# Altium PCB PCB_EMG_IMU.PcbDoc
Units mil, origin at the board's own origin, x right, y up, seen from the top; angles counter-clockwise.
Board outline 1570 x 985 mil, 4 copper layers (L1, L2, L3, L4), stack 30.634 mil thick; 65 components, 74 nets, 272 pads, 144 vias.
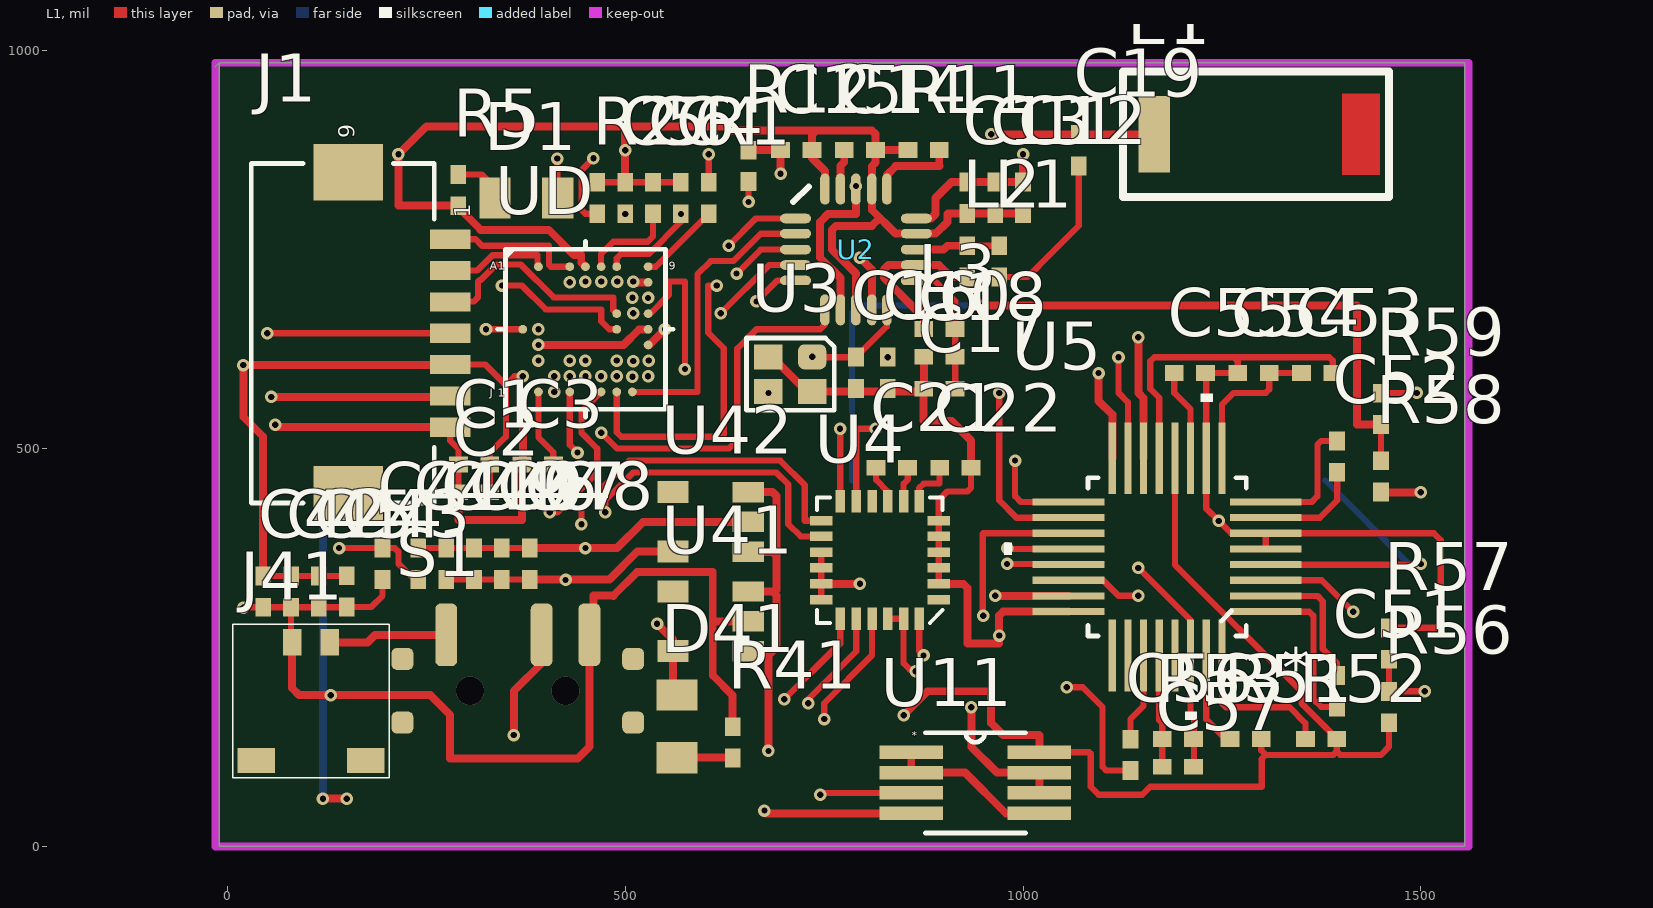
[diagram p0: L1 view]
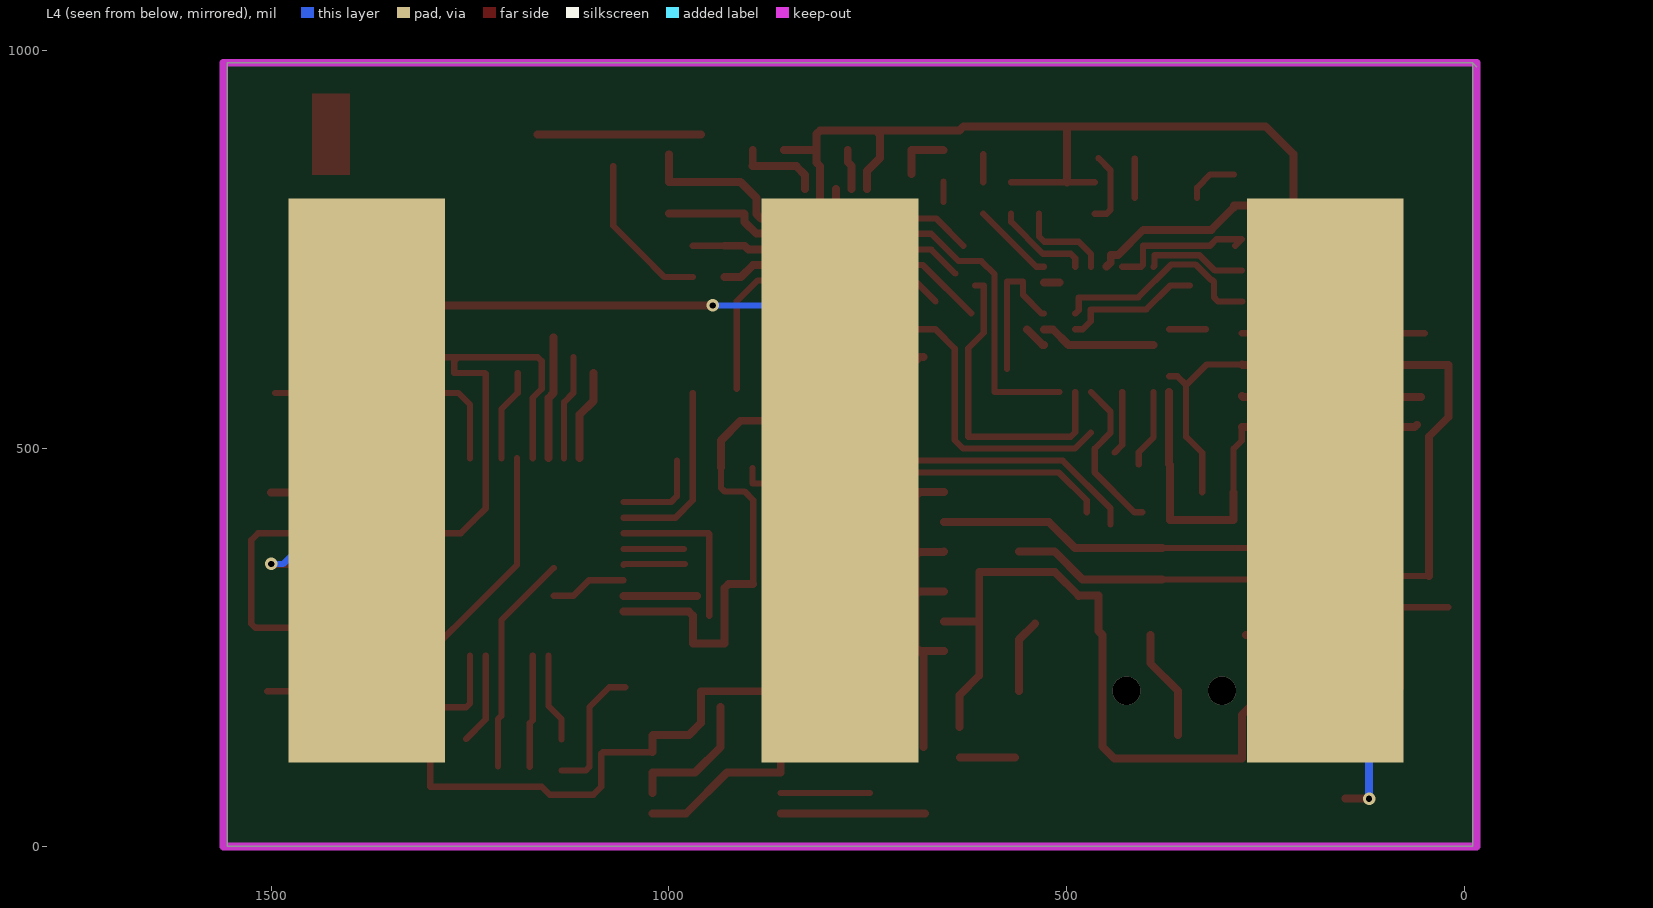
[diagram p1: L4 view, seen from below]
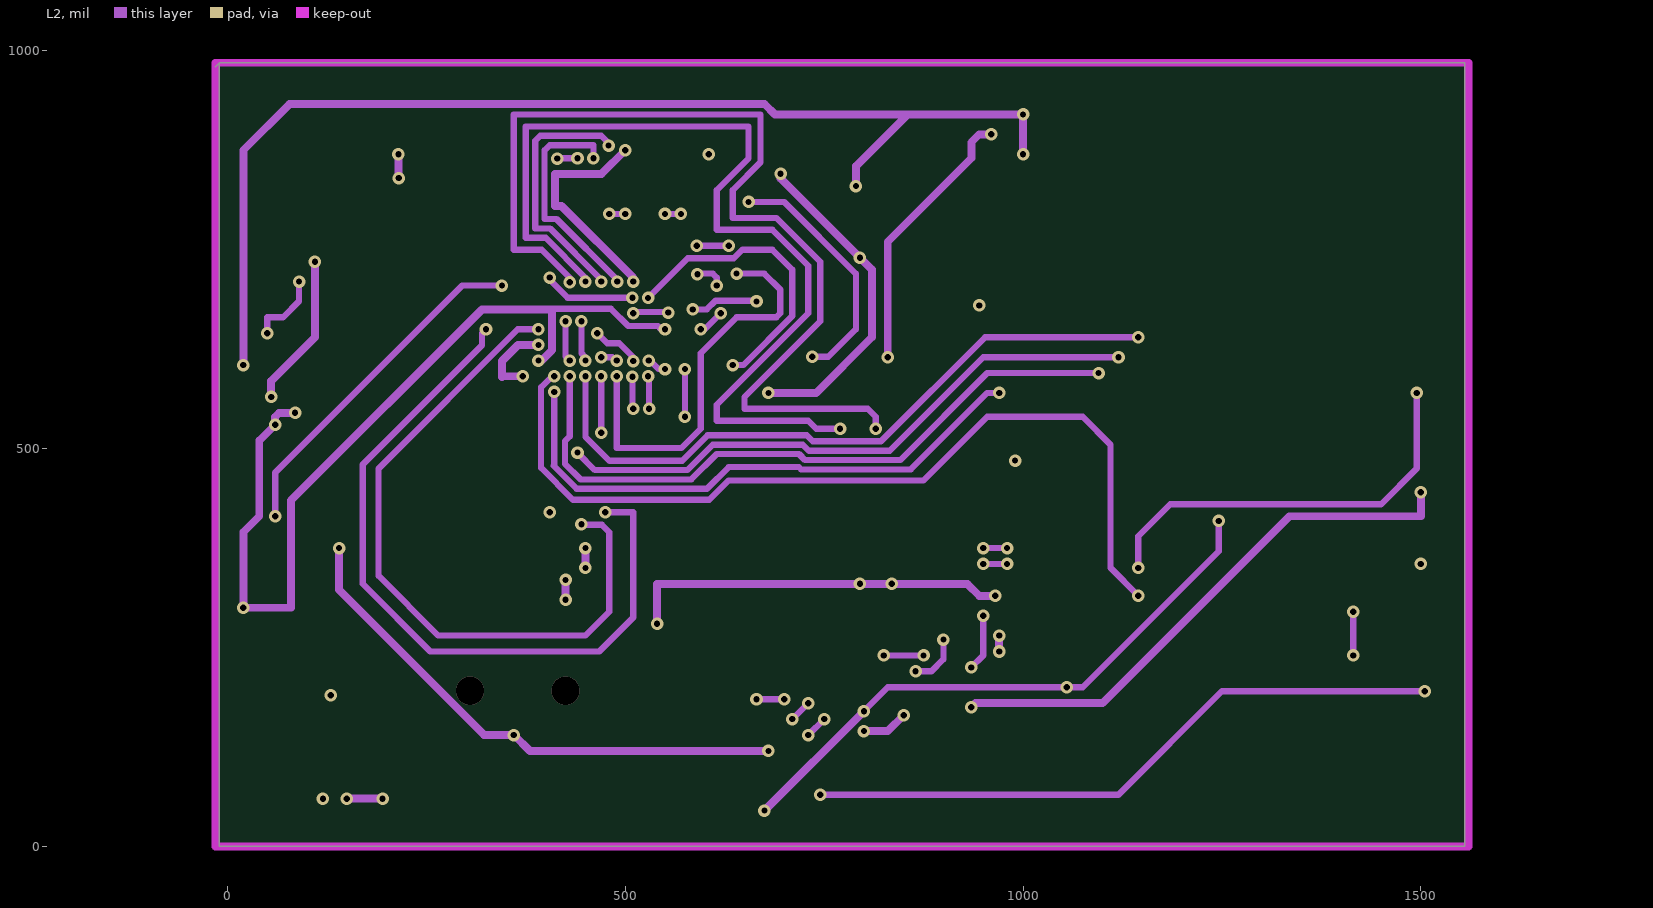
[diagram p2: L2]
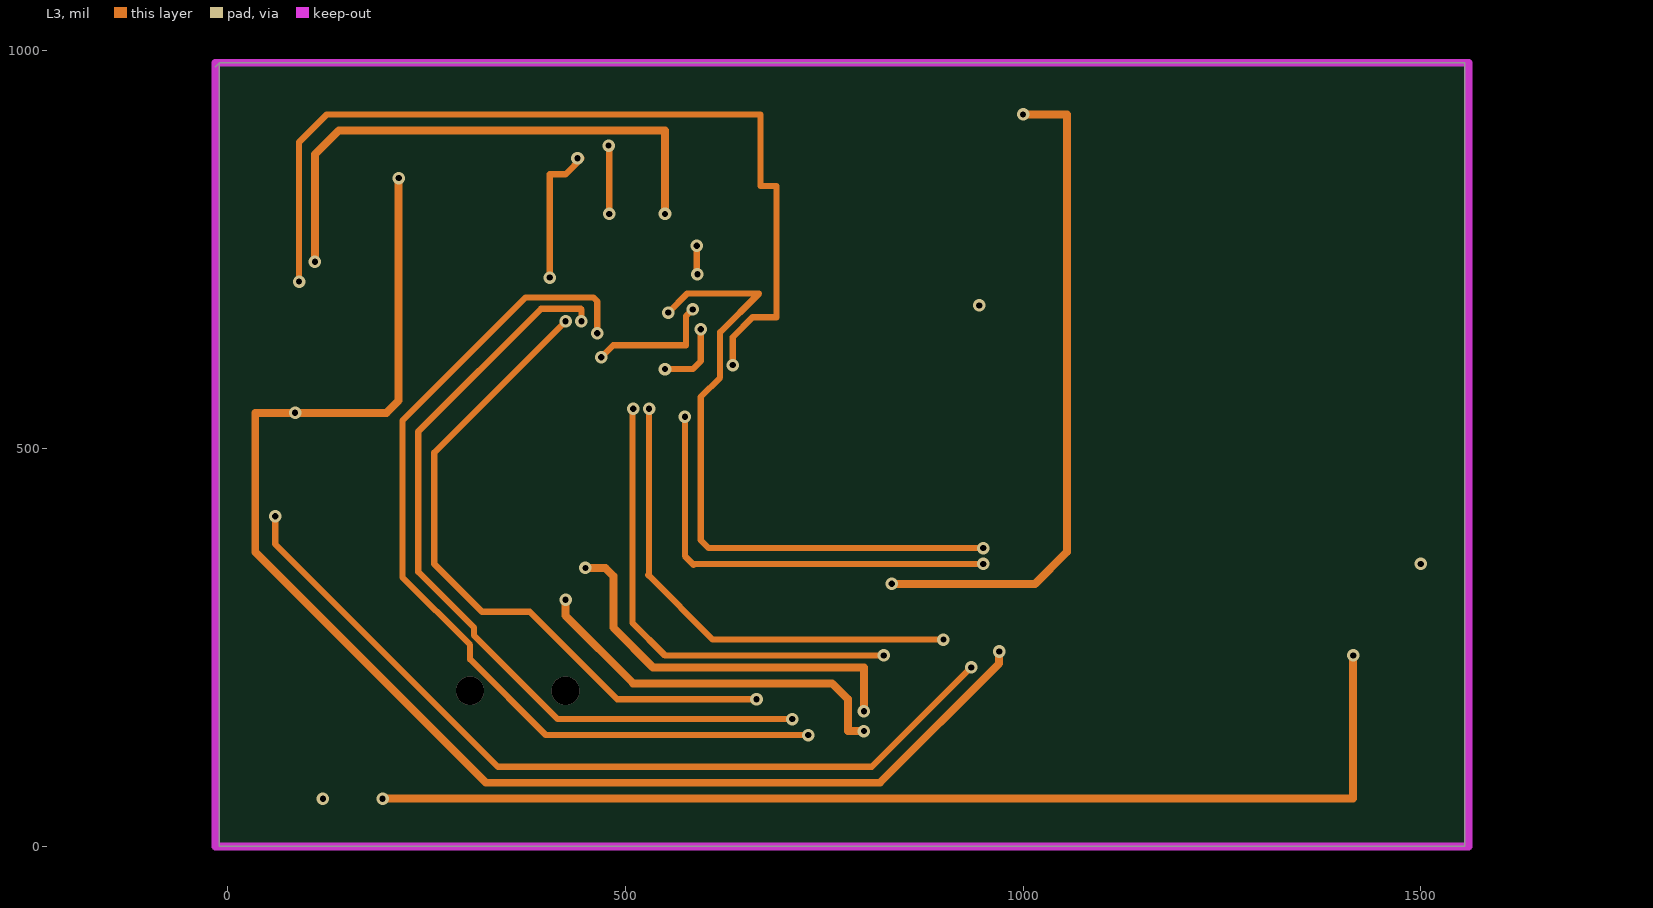
[diagram p3: L3]

## Layer stack, top to bottom
Top Solder: solder mask 0.4, Solder Resist, Dk 3.5
L1: signal copper 1.4
Dielectric 1: core 10, Dk 4.2
L2: signal copper 1.417
Dielectric 4: prepreg 5, Dk 4.2
L3: signal copper 1.417
Dielectric 5: core 10, FR-4, Dk 4.2
L4: signal copper 1.4
Bottom Solder: solder mask 0.4, Solder Resist, Dk 3.5

## Board outline
-15,980 -10,985 1555,985 1555,0 -10,0 -10,985

## Design rules (kind name [scope] priority, off if disabled: settings)
Clearance [All] p1: gap=3.94
PlaneConnect [All] p1: planeconnectstyle=Relief reliefexpansion=10 reliefentries=4 reliefconductorwidth=6 reliefairgap=5
PolygonConnect [All] p1: connectstyle=Relief reliefconductorwidth=10 reliefentries=4 polygonreliefangle="90 Angle" airgapwidth=10
RoutingVias [All] p1: holewidth=7.87 width=15.75 viastyle="Through Hole" minholewidth=7.87 minwidth=15.75 maxholewidth=28 maxwidth=50
SolderMaskExpansion [All] p1: expansion=4
Width [All] p1: maxlimit=10 minlimit=3.94 preferedwidth=3.94
29 further rules are at their usual default settings.

## Classes and differential pairs
component class PMU: C41 C42 C43 C44 C45 C46 C47 C48 C49 C410 D41 J41 R41 S1 U41 U42
component class nRF24L01: C10 C11 C12 C13 C14 C15 C16 C17 C18 C19 E1 L1 L2 L3 R11 R12 U2 U3
component class MSP430F5528ZQFE: C1 C2 C3 C4 C5 C6 D1 J1 R1 R2 R5 UD
component class LSM9DS0: C21 C22 U4
component class AFE_ADS129X: C51 C52 C53 C54 C55 C56 C57 R51 R52 R53 R56 R57 R58 R59 U5 U11

## Components (designator, comment, footprint, x,y, rotation, side; value= is the part's Value field where it differs from the comment)
C1 "Cap Semi" 0402 310,480 r180 top
C2 "Cap Semi" 0402 310,445 r180 top
C3 "Cap Semi" 0402 390,480 r180 top
C4 "Cap Semi" 0402 570,815 r90 top
C5 "Cap Semi" 0402 500,815 r270 top
C6 "Cap Semi" 0402 535,815 r270 top
C10 "" 0402 830,595.31 r270 top
C11 "" 0402 965,815.31 r90 top
C12 "" 0402 1000,815.31 r90 top
C13 "" 0402 930,815.31 r90 top
C14 "" 0402 795,875.31 r180 top
C15 "" 0402 715,875.31 r180 top
C16 "" 0402 790,595.31 r90 top
C17 "" 0402 895,575.31 r0 top
C18 "" 0402 895,615.31 r0 top
C19 "" 0402 1070,875 r270 top
C21 "Cap Semi" 0402 835,476.09 r0 top
C22 "Cap Semi" 0402 915,476.09 r180 top
C41 "Cap Semi" 0402 195,355.32 r90 top
C42 "Cap Semi" 0402 45,320.32 r90 top
C43 "Cap Semi" 0402 150,320.63 r90 top
C44 "Cap Semi" 0402 115,320.32 r90 top
C45 "Cap Semi" 0402 80,320.32 r90 top
C46 "Cap Semi" 0402 310,355.32 r270 top
C47 "Cap Semi" 0402 345,355.32 r270 top
C48 "Cap Semi" 0402 380,355.32 r270 top
C49 "Cap Semi" 0402 275,355.32 r270 top
C51 "Cap Semi" 0402 1394.69,195 r90 top
C52 "Cap Semi" 0402 1394.69,490 r90 top
C53 "Cap Semi" 0402 1369.69,595 r0 top
C54 "Cap Semi" 0402 1289.69,595 r180 top
C55 "Cap Semi" 0402 1209.69,595 r0 top
C56 "Cap Semi" 0402 1135,115 r270 top
C57 "Cap Semi" 0402 1194.69,100 r0 top
C410 "Cap Semi" 0402 240,355.32 r270 top
D1 "Led2 verte" "0805 (2012 metric)" 415,815 r90 top
D41 "Alim led verte" "0805 (2012 metric)" 565,190.32 r180 top
E1 "" ANT-2.45-CHP-B 1165,895 r0 top
J1 "FH12-7S-1SH(55)" CON7_1X7_DRBF_HS 170,650 r90 top
J41 "WM4459CT-ND" WM4459CT-ND 105,175.63 r180 top
L1 "" 0402 970,735.31 r270 top
L2 "" 0402 930,735.31 r90 top
L3 "" 0402 895,650.31 r0 top
R1 "" 0402 605,815 r270 top
R2 "" 0402 465,815 r90 top
R5 "" 0402 290,825 r270 top
R11 "" 0402 875,875.31 r0 top
R12 "" 0402 655,855.31 r90 top
R41 "" 0402 635,130.63 r90 top
R51 "" 0402 1279.69,135 r180 top
R52 "" 0402 1374.69,135 r180 top
R53 "" 0402 1194.69,135 r0 top
R56 "" 0402 1460,175 r270 top
R57 "" 0402 1460,255 r270 top
R58 "" 0402 1450,465 r90 top
R59 "" 0402 1450,550 r90 top
S1 "SWITCH" CUS-12B 365,85.63 r0 top
U2 "nRF24L01p" Component_nRF 790,750.31 r270 top
U3 "16MHz XTAL" 8Y-16.000MAAV-T 735,615.31 r180 top
U4 "Component_1" PCBComponent_1 820.22,360 r90 top
U5 "ADS1291_PBS_32" ADS129X 1181.1,364 r180 top
U11 "ADA4505-2ARMZ-RL" ADA4505-2ARM 940,80 r0 top
U41 "Reg 3.3V" TSOP-5ll 560,320.32 r270 top
U42 "Reg 3.3V" TSOP-5ll 560,445.32 r270 top
UD "Component_1" MSP430F5528ZQFE 450,650 r0 top

## Footprints (in the part's own frame and the unit in brackets; to place one, negate y for a bottom-side part, rotate by r counter-clockwise, add the part's x,y. Pads: shape width x height; smd on the part's side, far side on the other; paste and mask are expansions set on the pad)
8Y-16.000MAAV-T [mm] "SMD Crystal"
  rrect50% 0.9x0.8 smd: 1(0,0)
  rect 0.9x0.8 smd: 2(1.4,0) 3(1.4,1.1) 4(0,1.1)
  silkscreen extent -0.7,-0.6 2.1,1.7
0402 [mm] "Chip Capacitor, Body 1.0x0.5mm, IPC High Density"
  rect 0.6x0.5 smd: 1(-0.5,0) 2(0.5,0)
  body extent -0.55,-0.3 0.55,0.3, height 1.3
"0805 (2012 metric)" [mm] "Standard"
  rect 1.3x1 smd: 1(0,0) 2(0,2)
  body extent -0.7,-0.53 0.7,2.47, height 1.1
ADA4505-2ARM [mil]
  rect 80x17 smd mask+4: 1(-80.5,38.39) 2(-80.5,12.8) 3(-80.5,-12.8) 4(-80.5,-38.39) 5(80.5,-38.39) 6(80.5,-12.8) 7(80.5,12.8) 8(80.5,38.39)
  silkscreen extent -63,-63 63,63, body extent -80,-60 80,65, height 6
ADS129X [mil]
  rect 90x9 smd: 1(-124,68.9) 2(-124,49.21) 3(-124,29.53) 4(-124,9.84) 5(-124,-9.84) 6(-124,-29.53) 7(-124,-49.21) 8(-124,-68.9) 17(124,-68.9) 18(124,-49.21) 19(124,-29.53) 20(124,-9.84) 21(124,9.84) 22(124,29.53) 23(124,49.21) 24(124,68.9)
  rect 9x90 smd: 9(-68.9,-124) 10(-49.21,-124) 11(-29.53,-124) 12(-9.84,-124) 13(9.84,-124) 14(29.53,-124) 15(49.21,-124) 16(68.9,-124) 25(68.9,124) 26(49.21,124) 27(29.53,124) 28(9.84,124) 29(-9.84,124) 30(-29.53,124) 31(-49.21,124) 32(-68.9,124)
  silkscreen extent -100,-205 205,205
ANT-2.45-CHP-B [mil] "2.4 GHz Chip Anetnna"
  rect 40x96.46 smd: 1(0,0)
  L1 region: 236.22,-51.18 283.46,-51.18 283.46,51.18 236.22,51.18
  silkscreen extent -39,-79 295,79
Component_nRF [mil]
  rrect100% 12x39 smd: 1(-38.9,-75.9) 2(-19.9,-75.9) 3(0.1,-75.9) 4(19.51,-75.9) 5(38.93,-75.9) 11(38.93,75.9) 12(19.51,75.9) 13(0.1,75.9) 14(-19.9,75.9) 15(-38.9,75.9)
  rrect100% 39x12 smd: 6(75.9,-38.93) 7(75.9,-19.51) 8(75.9,-0.1) 9(75.9,19.9) 10(75.9,38.9) 16(-75.9,38.9) 17(-75.9,19.9) 18(-75.9,-0.1) 19(-75.9,-19.52) 20(-75.9,-38.93)
  silkscreen extent -79,-79 -60,-59, body extent -75,-76 75,74, height 1
CON7_1X7_DRBF_HS [mil]
  rect 24x51 smd: 1(113.11,-110) 2(73.74,-110) 3(34.37,-110) 4(-5,-110) 5(-44.37,-110) 6(-83.74,-110) 7(-123.11,-110)
  rect 71x87 smd: 8(-207.5,18) 9(197.5,18)
  silkscreen extent -218,-90 208,140, body extent -225,-95 215,145, height 1
CUS-12B [mm]
  rrect50% 0.7x2 smd: 1(-2.286,4.578) 2(0.762,4.578) 3(2.286,4.578)
  rrect50% 0.7x0.7 smd: ""(-3.683,1.778) ""(-3.683,3.81) ""(3.683,1.778) ""(3.683,3.81)
  body extent -3.85,0 3.85,5, height 1.4
MSP430F5528ZQFE [mil] "MSP430F5528ZQFE"
  round 11 smd: A2(-59.06,78.74) A4(-19.69,78.74) A5(0,78.74) A6(19.69,78.74) A7(39.37,78.74) A9(78.74,78.74) B4(-19.69,59.06) B5(0,59.06) B6(19.69,59.06) B7(39.37,59.06) B8(59.06,59.06) B9(78.74,59.06) C8(59.06,39.37) C9(78.74,39.37) D7(39.37,19.68) D8(59.06,19.68) D9(78.74,19.68) E1(-78.74,0) E2(-59.06,0) E7(39.37,0) E9(78.74,0) F2(-59.06,-19.68) F9(78.74,-19.68) G2(-59.06,-39.37) G4(-19.69,-39.37) G5(0,-39.37) G7(39.37,-39.37) G8(59.06,-39.37) G9(78.74,-39.37) H1(-78.74,-59.06) H3(-39.37,-59.06) H4(-19.69,-59.06) H5(0,-59.06) H6(19.69,-59.06) H7(39.37,-59.06) H8(59.06,-59.06) H9(78.74,-59.06) J1(-78.74,-78.74) J2(-59.06,-78.74) J3(-39.37,-78.74) J4(-19.69,-78.74) J6(19.69,-78.74) J7(39.37,-78.74) J8(59.06,-78.74)
  silkscreen extent -110,-110 110,110, body extent -115,-115 115,115, height 1
PCBComponent_1 [mil]
  rect 12x28 smd: 1(-49.91,-73.91) 2(-29.91,-73.91) 3(-9.91,-73.91) 4(9.93,-73.91) 5(29.62,-73.91) 6(49.3,-73.91) 13(49.3,73.91) 14(29.62,73.91) 15(9.93,73.91) 16(-9.91,73.91) 17(-29.91,73.91) 18(-49.91,73.91)
  rect 28x12 smd: 7(73.91,-49.3) 8(73.91,-29.62) 9(73.91,-9.93) 10(73.91,9.91) 11(73.91,29.91) 12(73.91,49.91) 19(-73.91,49.91) 20(-73.91,29.91) 21(-73.91,9.91) 22(-73.91,-9.93) 23(-73.91,-29.62) 24(-73.91,-49.3)
  silkscreen extent -79,-79 79,79, body extent -85,-85 75,85, height 1
TSOP-5ll [mm] "TSOP-5 package"
  rect 0.65x1 smd: 1(1.9,2.4) 2(0.95,2.4) 3(0,2.4)
  rect 0.7x1 smd: 4(0,0) 5(1.9,0)
WM4459CT-ND [mm] "Holder"
  rect 0.6x0.85 smd mask+0.08: 1(-0.6,-2.052) 2(0.6,-2.052)
  rect 1.2x0.8 smd mask+0.08: ""(-1.75,1.723) ""(1.75,1.723)
  silkscreen extent -2.5,-2.63 2.5,2.27, body extent -2.1,-2.28 2.1,2.25, height 1.45

## Part data
C1 C2 C3 C4 C5 C6 C21 C22 C41 C42 C43 C44 C45 C46 C47 C48 C49 C51 C52 C53 C54 C55 C56 C57 C410: "Capacitor (Semiconductor SIM Model)"
C10 C11 C12 C13 C14 C15 C16 C17 C18 C19: library part "Cap Semi", "Capacitor (Semiconductor SIM Model)"
D1 D41: library part LED3, "LED 2X1.2MM 570NM GN WTR CLR SMD"
E1: library part Antenna, "Generic Antenna"
J1 U5 U11: "Imported"
L1 L2 L3: library part Inductor, "Inductor"
R1 R2 R5 R11 R12 R41 R51 R52 R53 R56 R57 R58 R59: library part "Res Semi", "Semiconductor Resistor"
S1: library part Component_1
U2: library part Component_nRF
U3: library part 8Y-16.000MAAV-T, "SMD 16 MHz XTAL"
U41 U42: library part NCP603SN330T1G, "IC REG LDO 3.3V 0.3A 5TSOP"

## Free pads (board coordinates)
  rect 196.85x708.66 smd far side: "Electrode 0"(785,460) "Electrode 1"(175,460) "Electrode 2"(1380,460)

## Via types
v1: diameter 15.75, hole 7.87, L1 to L2, 98 vias
v2: diameter 15.75, hole 7.87, L2 to L3, 41 vias
v3: diameter 15.75, hole 7.87, L1 to L4, 3 vias
v4: diameter 35.43, hole 35.43, L1 to L4, 2 vias

## Nets (pads, with @x,y where several pads share a name; then routed paths per layer and width w, separated by ;. In a path a pad name is that pad's centre, name@x,y a point inside that pad or via, vN(x,y) a via of type N, cw(c..) or ccw(c..) an arc to the next point about the centre after c; other vN are vias at no path point)
5V: C4.1 J1.6 UD.A7 | length 1251.2
  L1 w7.87: UD.A7 489.37,739.37 495,745 530,745 570,785 C4.1
  L1 w10: v1(55,565) 278.74,565 J1.6
  L2 w7.87: v2(550,795) v1(570,795)
  L2 w10: v1(55,565) 55,585 110,640 v2(110,735)
  L3 w10: v2(110,735) 110,870 140,900 550,900 v2(550,795)
AGND: C46.1 C47.1 C48.1 C49.1 C53.2 C54.2 C55.2 C56.2 C410.1 R57.1 U5.5 U5.6 U5.10 U5.13 U11.4 U42.2 | length 3149.2
  L1 w7.87: C410.1 C49.1 C46.1 C47.1 C48.1 ; v1(1055,200) 1075,200 1100,175 1100,100 1104.69,95.31 C56.2 ; U5.13 1171.26,563.74 1160,575 1160,610 1165,615 1385,615 1389.37,610.63 C53.2 ; C55.2@1230.31,594.06 U5.10 1230.31,424.69 v1(1245.89,409.11) 1261.47,393.53 U5.6 ; C55.2@1231.26,595 C54.2 1270,610 1265,615 ; U5.5 U5.6 ; R57.1 1519.69,274.68 1525,280 1525,385 1516.47,393.53 U5.6
  L1 w10: C48.1 489.68,375 522.6,407.91 U42.2 ; v1@678.39,41.61 U11.4
  L2 w7.87: v2(800,170) 830,200 v1(1055,200) 1075,200 1245.89,370.89 v1(1245.89,409.11)
  L2 w10: v2(450,350) v1(450,375) ; v1(675,45) v2(800,170)
  L3 w10: v2(450,350) 475,350 485,340 485,275 535,225 800,225 v2(800,170)
AVDD: C46.2 C47.2 C48.2 C49.2 R51.1 R52.1 R56.2 U5.12 U11.8 U42.5 | length 2151.7
  L1 w7.87: C49.2 C46.2 C47.2 C48.2 ; U11.8 1083.39,118.39 1085,116.77 1085,75 1095,65 1150,65 1160,75 1300,75 1300,110 1305,115 ; U5.12 1190.94,354.06 1350,195 1350,180 R52.1@1394.37,135.63 ; R51.1 1299.37,120.63 1305,115 ; R52.1 1394.37,119.37 ; R56.2 1460,125 1450,115 1398.74,115 1394.37,119.37 ; 1305,115 1390,115 1394.37,119.37
  L1 w10: C48.2 480.31,335.63 515.2,370.51 U42.5 ; v1(850,165) 880,195 960,195 960,155 975,140 1020,140 1020.5,139.5 U11.8
  L2 w10: v2(425,310) v1(425,335) ; v2(800,145) 830,145 v1(850,165)
  L3 w10: v2(425,310) 425,290 510,205 760,205 780,185 780,145 v2(800,145)
AVDD/2: R58.1 U11.6 U11.7 | length 919
  L1 w10: v1(935,175) 935,125 967.2,92.8 U11.7 U11.6 ; R58.1 1450.31,445 v1(1500,445)
  L2 w10: v1(935,175) 940,180 1100,180 1335,415 1500,415 v1(1500,445)
CLK_AFE: U5.17 | length 115
  L1 w7.87: v1(990,485) 990,440 997.1,432.9 U5.17
E+: "pad.Electrode 2" U5.4 | length 358.4
  L1 w7.87: U5.4 v3@1500,354.16
  L4 w7.87: 1380,460 1485,355 v3(1500,355)
E-: "pad.Electrode 1" U5.3 | length 2001.2
  L1 w7.87: U5.3 1375.53,334.47 v1(1415,295)
  L1 w10: v3(120,60) v1(150,60)
  L2 w7.87: v2(1415,240) v1(1415,295)
  L2 w10: v1(150,60) v2(195,60)
  L3 w10: v2(195,60) 1415,60 v2(1415,240)
  L4 w10: v3(120,60) 120,405
GND: C1.2 C2.2 C3.2 C4.2 C5.1 C6.1 C10.2 C11.1 C12.1 C13.1 C14.1 C15.1 C16.1 C17.1 C18.1 C22.1 C41.1 C42.1 C43.1 C44.1 C45.1 J1.7 J41.2 R2.2 R5.2 R11.1 R41.2 S1.3 U2.8 U2.14 U2.17 U2.20 U3.2 U3.4 U4.2 U4.3 U4.4 U4.5 U4.6 U5.24 U41.2 UD.A5 UD.B8 UD.B9 UD.F9 UD.G2 UD.J1 | length 7812.1
  L1 w7.87: v1@20.63,300.63 C42.1 C45.1 ; J41.2@80,257.8 C45.1 ; C43.1@149.69,300.63 C44.1 C45.1 ; C43.1 180.63,300.94 195,315.31 C41.1 ; J1.7 280,510 290.31,499.69 C1.2 C2.2 ; R2.2 C5.1 C4.2 ; U4.2 U4.3 U4.4 U4.5 U4.6 894.13,435.22 905,446.09 930,446.09 934.69,450.78 C22.1
  L1 w10: v1(60,530) 63.11,526.89 J1.7 ; J41.2 81.38,198.94 90,190.32 255,190.32 280,165.32 280,110.32 440,110.32 455,125.32 S1.3 460,270.87 460,315.32 485,315.32 ; R5.2@290,803.35 318.35,775 403.74,775 435.56,743.18 444.75,743.18 444.75,733.99 UD.A5 ; R5.2 215.31,805.31 215.31,870.31 250,905 500,905 ; C2.2 290.31,410.31 290.63,410 370,410 C3.2@370,479.68 ; C3.2@371.26,480.94 UD.J1 ; 485,315 515,345 610,345 610,282.91 610,215 635,190 R41.2 ; C5.1 500,905 ; UD.B8 UD.B9 ; UD.F9 530.31,630.32 v1(550,650) ; 612.09,282.91 U41.2 ; U3.2 U3.2@680.2,615 ; U3.2@684.69,615.31 727.99,572.01 U3.4 872.01,572.01 C17.1@875,575 ; U2.20 751.07,848.93 734.69,865.31 C15.1 734.69,894.69 740,900 ; U2.8 789.9,720.1 760,750 760,775 765,780 810,780 820,790 ; R11.1 C14.1 ; C18.1 C17.1 C17.1@875,575 ; U4.2 894.22,330 925,330 930,325 930,255 970,255 v1(970,265) 970,290 975.1,295.1 U5.24 ; C22.1 934.69,510.32 910,535 875,535 C17.1@875,575 ; C12.1 C11.1 C13.1 905.63,795.63 905,795 905,785 890.22,770.22 U2.14 839.78,770.22 809.9,800.1 U2.17 809.9,854.9 814.69,859.69 C14.1 ; 500,905 630,905 635,900 740,900 ; 740,900 810,900 814.69,895.31 C14.1
  L2 w7.87: 408.19,675 408.94,675.75 481.98,675.75 503.48,654.25 540.75,654.25 545,650 v1(550,650)
  L2 w10: v2(85,545) 65,545 60,540 v1(60,530) 40,510 40,415 20,395 v1(20,300) 80,300 80,435 320,675 408.19,675 408.19,623.78 395.03,610.63 v1(390.94,610.63) ; v2@215,840.31 v1(215,870) ; v1(500,875) 470,845 411.5,845 411.5,805 420,805 510,715 v1(510,710) ; v2(970,245) v1(970,265)
  L3 w10: v2(215.31,840) 215.31,560.31 200,545 v2(85,545) 35,545 35,370 325,80 820,80 970,230 v2(970,245)
  other v1: 130,190
GRN_LED: D1.1 UD.C8 | length 374.5
  L1 w7.87: D1.1@414.57,815.43 v1(414.57,864.57)
  L2 w7.87: v2@405,712.1 427.73,689.37 428.04,689.68 v1(509.06,689.68) ; v1(414.57,864.57) 415,865 v2(440,865)
  L3 w7.87: v2@405,712.1 v2(405,715) 405,845 425,845 445,865 v2(440,865)
MCLK: UD.J6 | length 200.5
  L1 w7.87: v1(405,420) 415,420 465,470 465,500 445,520 445,546.57 UD.J6
NetC3_1: C3.1 UD.J2 | length 99
  L1 w7.87: UD.J2 390.94,514.06 409.69,495.32 C3.1
NetC5_2: C5.2 UD.B6 | length 430.4
  L2 w7.87: v1(470,710) 470,712.27 405.46,776.81 386.81,776.81 386.81,886.81 393.19,893.19 470,893.19 480,883.19 v2@480,880 ; v2(480,795) v1(500,795)
  L3 w7.87: v2(480,795) v2@480,880
  other v2: 479.06,880.94
NetC6_2: C6.2 UD.A6 | length 119
  L1 w7.87: UD.A6 469.69,744.68 485,760 528.3,760 535,766.7 C6.2
NetC10_1: C10.1 C19.1 E1.1 | length 547.3
  L1 w10: v1(960,895) C19.1@1069.69,895 ; C19.1@1070,895 E1.1
  L2 w10: v1(830,615) 830,760 935,865 935,885 945,895 v1(960,895)
NetC14_2: C14.2 U2.19 | length 51.1
  L1 w10: U2.19 770.48,855.48 775.31,860.32 C14.2
NetC15_2: C15.2 R12.2 U2.9 U3.3 | length 554
  L1 w10: R12.2 655.31,875.31 C15.2 v1(695.31,845.32) ; v1(795,740) 809.9,725.1 U2.9
  L2 w10: v1(680,570) 740,570 810,640 810,725 v1(795,740) 695.31,839.68 v1(695.31,845.32)
NetC16_2: C16.2 R12.1 U2.10 U3.1 | length 467.9
  L1 w7.87: v1(655,810) R12.1 ; v1(735,615.31) 735.31,615 C16.2 828.9,653.9 U2.10
  L2 w7.87: v1(655,810) 700,810 790,720 790,650 755.31,615.31 v1(735,615.31)
NetC17_2: C17.2 C18.2 L3.2 U2.11 | length 169.6
  L1 w7.87: U2.11 888.61,711.39 914.69,685.31 L3.2 C18.2 C17.2
NetC19_2: C19.2 L1.2 | length 202
  L1 w7.87: L1.2 1005.63,715.63 1035,745 1070,780 C19.2
NetC21_1: C21.1 U4.9 | length 48.3
  L1 w7.87: C21.1 815.31,460.78 830.16,445.93 U4.9
NetC21_2: C21.2 U4.8 | length 44.4
  L1 w7.87: U4.8 849.84,455.93 855,461.09 855,475.78 C21.2
NetC22_2: C22.2 U4.7 | length 64.1
  L1 w7.87: U4.7 869.53,450.62 875,456.09 895,456.09 C22.2@895,475.78
NetC41_2: C41.2 C410.2 S1.2 U41.1 U41.3 U42.1 U42.3 | length 1398.4
  L1 w7.87: v1(140.31,375) C41.2 210.31,375 215,370.32 215,355.32 C410.2@234.69,335.63
  L1 w10: v1(360,140) 360,195.31 395,230.32 S1.2 ; U41.1 685.2,245.51 690,250.32 ; U41.3 685,320.32 686.38,318.94 690,322.56 690,365.32 ; U42.1 654.69,370.32 685,370.32 690,365.32 ; U42.3 685,445.32 690,440.32 690,365.32 ; v1@680,125 680,240.32 690,250.32 ; 690,315.32 690,250.32
  L2 w10: v1(140.31,375) 140.31,322.62 322.62,140.32 360,140.32 380.31,120 v1(680,120)
NetC51_1: C51.1 U5.1 | length 200.7
  L1 w7.87: U5.1 1359.9,295.1 1365,290 1365,185 1374.69,175.31 C51.1
NetC51_2: C51.2 U5.2 | length 175.3
  L1 w7.87: U5.2 1370.21,314.79 1376.81,308.19 1376.81,248.19 1394.68,230.32 C51.2
NetC52_1: C52.1 U5.7 | length 134.4
  L1 w7.87: U5.7 1373.21,413.21 1395,435 1395,470 C52.1
NetC52_2: C52.2 U5.8 | length 159.5
  L1 w7.87: U5.8 1362.9,432.9 1370,440 1370,505 1374.69,509.68 C52.2
NetC53_1: C53.1 C54.1 U5.9 | length 195.7
  L1 w7.87: U5.9 1250,555 1265,570 1305,570 1309.37,574.37 C54.1 C53.1
NetC55_1: C55.1 U5.11 | length 115.5
  L1 w7.87: C55.1 1190,570 1210.63,549.37 U5.11
NetC56_1: C56.1 U5.27 | length 112.2
  L1 w7.87: C56.1 1135,160 1151.57,176.57 U5.27
NetC57_1: C57.1 R53.1 U5.28 | length 141.5
  L1 w7.87: U5.28 1171.26,158.74 1175,155 R53.1 C57.1
NetD1_2: D1.2 R5.1 | length 66.2
  L1 w7.87: R5.1 319.69,844.68 336.26,828.11 D1.2
NetD41_2: D41.2 R41.1 | length 69.4
  L1 w10: D41.2 R41.1@634.37,111.57
NetL1_1: L1.1 L2.2 U2.13 | length 106.1
  L1 w7.87: L2.2 L1.1
  L1 w10: U2.13 900.22,750.22 905,755 L2.2
NetL2_1: L2.1 L3.1 U2.12 | length 215.1
  L1 w10: L3.1 875.32,674.68 875,675 865,675 825,715 825,725 830.8,730.8 U2.12 894.2,730.8 909.37,715.63 L2.1
NetR1_1: R1.1 R2.1 UD.B7 | length 420.5
  L1 w7.87: v1(460,865) 445,850 445,800 449.69,795.32 R2.1 ; R1.1 v1(605,870)
  L2 w7.87: v1(460,865) 460,881.38 405,881.38 398.62,875 398.62,788.62 413.65,788.62 490,712.27 v1(490,710)
NetR1_2: R1.2 UD.A9 | length 103.8
  L1 w7.87: UD.A9 538.43,728.74 R1.2
NetR11_2: R11.2 U2.16 | length 108.8
  L1 w10: U2.16 828.9,843.9 840,855 895,855 894.69,855.31 R11.2
NetR51_2: R51.2 U5.31 | length 115.2
  L1 w7.87: U5.31 1230.31,159.69 R51.2@1255,135
NetR52_2: R52.2 U5.32 | length 195.4
  L1 w7.87: U5.32 1250,180 1255,175 1335,175 1355,155 R52.2
NetR56_1: R56.1 R57.2 U11.3 | length 1011.5
  L1 w7.87: v1@747.2,67.2 U11.3 ; R56.1 R57.2 ; R56.1@1460.32,195 v1(1505,195)
  L2 w7.87: v1(745,65) 1120,65 1250,195 v1(1505,195)
NetU2_1: U2.1 UD.J7 | length 607.4
  L1 w7.87: UD.J7 489.37,520.63 495,515 623.94,515 623.94,626.06 604.25,645.75 604.25,705 v1(615,705) ; v1(630,755) 664.22,789.22 U2.1
  L2 w7.87: v2(590,755) v1(630,755) ; v2(590.75,719.25) 591.5,720 610,720 615,715 v1(615,705)
  L3 w7.87: v2(590,755) 590,720 v2(590.75,719.25)
NetU2_2: U2.2 UD.J8 | length 374.1
  L1 w7.87: UD.J8 590.75,571.26 590.75,719.25 607.24,735.75 635.75,735.75 670.22,770.22 U2.2
NetU2_3: U2.3 UD.H7 | length 601.6
  L1 w7.87: v1(640,720) 670.22,750.22 U2.3
  L2 w7.87: v1(489.37,590.94) 489.37,500.63 570.63,500.63 595,525 595,620 640,665 690,665 695,670 695,700 675,720 v1(640,720)
NetU2_4: U2.4 UD.G9 | length 269.2
  L1 w7.87: v1(620,670) 680.8,730.8 U2.4
  L2 w7.87: v1(529.68,610.63) 531.33,610.63 541.96,600 v2(550,600) v2@552.73,600 ; v2(595,650) 600,650 v1(620,670)
  L3 w7.87: v2(550,600) 585,600 595,610 v2(595,650)
NetU2_5: U2.5 UD.G7 | length 325.3
  L1 w7.87: v1(665,685) 691.39,711.39 U2.5
  L2 w7.87: v2(470,615) 483.74,615 488.74,610 v1(489.37,610.63) ; v2(585,675) 602.73,675 613.48,685.75 v1@664.25,685.75
  L3 w7.87: v2(470,615) 485,630 576.25,630 ; 576.25,631.25 576.25,666.25 v2(585,675)
NetU2_6: U2.6 UD.H6 | length 510.8
  L1 w7.87: v1(470,520) 490,500 630,500 640.75,510.75 640.75,625.75 665,650 745,650 751.07,656.07 U2.6
  L2 w7.87: v1(469.69,590.94) 470,590.63 v1(470,520)
NetU4_11: U4.11 UD.B4 | length 1372.4
  L1 w7.87: 790,525 v1(815,525) ; U4.11 790.31,525
  L2 w7.87: v1(430.31,709.06) 430.31,714.68 395,750 360,750 360,920 670,920 670,860 635,825 635,790 690,790 745,735 745,660 650,565 650,550 805,550 815,540 v1(815,525)
NetU4_12: U4.12 UD.B5 | length 1293.9
  L1 w7.87: v1(770,525) 770.31,524.69 U4.12
  L2 w7.87: v1(450,710) 450,715 400,765 375,765 375,905 655,905 655,865 615,825 615,775 685,775 730,730 730,670 615,555 615,535 730,535 740,525 v1(770,525)
NetU4_13: U4.13 UD.E2 | length 1284.9
  L1 w7.87: v1(445,405) 445,425 505,485 695,485 725.7,454.3 725.7,409.3 U4.13
  L2 w7.87: v1(390.94,650) 365,650 190,475 190,340 265,265 450,265 480,295 480,395 470.75,404.25 445.75,404.25 v1(445,405)
NetU4_14: U4.14 UD.E1 | length 1347
  L1 w7.87: v1(325,650) UD.E1 ; v1(475,420) 475,435 510,470 690,470 705,455 705,405 720.38,389.62 U4.14
  L2 w7.87: v1@320,645 320,630 170,480 170,330 255,245 467.27,245 510,287.73 510,420 v1(475,420)
NetU4_19: U4.19 UD.G4 | length 1065.9
  L1 w7.87: v1(700,185) 770,255 770.31,254.69 ; 770.31,255 U4.19
  L2 w7.87: v2(425,660) 425,615.94 v1(430.31,610.63) ; v2(665,185) v1(700,185)
  L3 w7.87: v2(425,660) 260,495 260,355 320,295 380,295 490,185 v2(665,185)
NetU4_20: U4.20 UD.G5 | length 1224
  L1 w7.87: v1(730,180) 730,185 790.31,245.31 U4.20
  L2 w7.87: v2(445,660) 445,620 450,615 v1(450,610.63) ; v2(710,160) v1(730,180)
  L3 w7.87: v2(445,660) 445,675 444.25,675.75 394.25,675.75 240,521.5 240,470 240,345 310,275 310,265 415,160 v2(710,160)
NetU4_21: U4.21 UD.G8 | length 1399.4
  L1 w7.87: v1(750,160) 750,180 810,240 810.31,240 U4.21
  L2 w7.87: v2(465,645) 477.5,632.5 492.5,632.5 510,615 v1(510,610) ; v2(730,140) v1(750,160)
  L3 w7.87: 220,475 220,535 375,690 460,690 465,685 v2(465,645) ; 220,481.64 220,338.3 305,253.3 305,235 400,140 v2(730,140)
NetU4_22: U4.22 U4.23 UD.H9 | length 817.6
  L1 w7.87: U4.22 U4.23 849.84,230.16 857.5,222.5 862.5,222.5 v1(865,220)
  L2 w7.87: v1(528.74,590.94) 530,589.69 v2(530,550) ; v1(865,220) 885,220 900,235 v2(900,260)
  L3 w7.87: 528.74,341.26 610,260 v2(900,260) ; 530,340 v2(530,550)
NetU4_24: U4.24 UD.H8 | length 742
  L1 w7.87: U4.24 869.53,245.47 v1(875,240)
  L2 w7.87: v1(509.06,590.32) 509.06,550.95 v2(510,550) ; v2(825,240) v1(875,240)
  L3 w7.87: v2@509.06,550.94 509.06,280.94 550,240 v2(825,240)
NetU5_14: U5.14 UD.H5 | length 1008.7
  L1 w10: v1(1145,640) 1145,570 1151.57,563.43 U5.14
  L2 w7.87: v1(450,590.94) 450,515 480.12,484.88 571.59,484.88 603.51,516.81 728.19,516.81 735.75,509.25 821.52,509.25 952.27,640 v1(1145,640)
NetU5_15: U5.15 UD.J4 | length 966.3
  L1 w7.87: UD.J4 430.31,504.68 v1(440,495) ; v1(1120,615) 1120,570 1131.89,558.11 U5.15
  L2 w7.87: v1(440,495) 461.93,473.07 578.07,473.07 610,505 723.3,505 730.86,497.44 832.44,497.44 950,615 v1(1120,615)
NetU5_16: U5.16 UD.H4 | length 967.3
  L1 w10: v1(1095,595) 1095,560 1112.2,542.8 U5.16
  L2 w7.87: v1(430.31,590.94) 430.31,515.32 424.25,509.25 424.25,480.75 443.74,461.26 582.96,461.26 614.89,493.19 718.4,493.19 725.96,485.63 845.63,485.63 955,595 v1(1095,595)
NetU5_18: U5.18 UD.J3 | length 948.7
  L1 w7.87: v1(970,570) 970,500 970,435 991.79,413.21 U5.18
  L2 w7.87: v1(410.63,571.26) 410.63,478.93 410,478.3 438.85,449.45 602.75,449.45 630.11,476.81 718.08,476.81 721.07,473.82 858.82,473.82 955,570 v1(970,570)
NetU5_19: U5.19 UD.E7 | length 1973.2
  L1 w7.87: v1(345,705) 370,705 400,675 470,675 470,660 480,650 UD.E7 ; v1@949.25,290 949.25,392.78 950,393.53 U5.19
  L2 w7.87: v2(60,415) 60,470 295,705 v1(345,705) ; v2(935,225) 950,240 v1(950,290)
  L3 w7.87: v2(60,415) 60,380 340,100 810,100 v2(935,225)
NetU5_20: U5.20 UD.D8 | length 975.9
  L1 w7.87: v1@981.16,373.84 U5.20
  L2 w7.87: v1(510,670) 511.81,671.81 553.19,671.81 v2@555,670 ; v2(950,375) v1(980,375)
  L3 w7.87: v2(554.06,670.94) 578.11,695 668.11,695 619.25,646.14 619.25,589.25 595,565 595,385 605,375 v2(950,375)
NetU5_21: U5.21 UD.D9 | length 905
  L1 w7.87: UD.D9 531.33,669.68 555,693.36 555,710 575,710 v1(575,600) ; v1(980,355) 1056.26,355 U5.21
  L2 w7.87: v2(575,540) v1(575,600) ; v2(950,355) v1(980,355)
  L3 w7.87: v2(575,540) 575,365 585.84,354.16 586.69,355 v2(950,355)
NetU5_22: U5.22 UD.H3 | length 1214
  L1 w7.87: U5.22 1100.53,334.47 1120,315 v1(1145,315)
  L2 w7.87: v1(410.63,590.94) 408.04,590.94 394.25,577.15 394.25,475.75 434.25,435.75 605.75,435.75 630,460 875,460 955,540 1075,540 1110,505 1110,350 v1(1145,315)
NetU11_1: U11.1 U11.2 U11.5 | length 207.8
  L1 w10: U11.1 U11.2 927.2,92.8 978.39,41.61 U11.5
REF: "pad.Electrode 0" R58.2 R59.1 | length 1074.5
  L1 w7.87: R58.2 R59.1
  L1 w10: v3(945,680) 1420,680 1420,530.43 1450,530.43 R59.1
  L4 w7.87: 785,460 785,670 795,680 v3(945,680)
RLD: C57.2 R53.2 R59.2 U5.30 | length 843.7
  L1 w7.87: v1(1145,350) 1210.63,284.37 U5.30 1210.63,164.37 1215,160 C57.2@1215,100.63 ; R59.2 1450.31,570 v1(1495,570)
  L2 w7.87: v1(1145,350) 1145,390 1185,430 1450,430 1495,475 v1(1495,570)
RLDIN_MUX: U5.29
RST: J1.2 UD.A2 | length 132.8
  L1 w7.87: J1.2 313.74,723.74 333.19,743.19 389.84,743.19 389.84,729.84 UD.A2
RXD: J1.4 UD.C9 | length 1843.7
  L1 w7.87: v1(50,645) J1.4
  L2 w7.87: v1(50,645) 50,665 70,665 90,685 v2(90,710) ; v1(528.74,689.37) 578.62,739.25 636.52,739.25 647.27,750 685,750 710,725 710,666.7 648.3,605 v2(635,605)
  L3 w7.87: v2(90,710) 90,885 125,920 670,920 670,830 690,830 690,665 660,665 635,640 v2(635,605)
TEST: J1.1 UD.A4 | length 190.1
  L1 w7.87: J1.1@288.11,755 J1.1 311.89,763.11 320,755 404.06,755 404.06,734.81 404.32,734.54 404.32,730.68 406.26,728.74 UD.A4
TXD: J1.3 UD.D7 | length 275.8
  L1 w7.87: J1.3@279.37,685 310,685 315,690 315,710 316.93,711.93 318.63,711.93 338.08,731.38 368.62,731.38 410,690 485,690 485,674.06 UD.D7
VBAT: J41.1 S1.1 | length 150.3
  L1 w10: J41.1 176.1,256.42 185.55,265.87 S1.1
VDD: C1.1 C2.1 C11.2 C12.2 C13.2 C42.2 C43.2 C44.2 C45.2 D41.1 J1.5 U2.7 U2.15 U2.18 U4.15 U4.16 U4.17 U4.18 U5.23 U41.5 UD.E9 UD.F2 UD.H1 | length 4600.9
  L1 w7.87: C42.2 C45.2 C44.2 C43.2@149.69,340 ; J1.5 324.37,605.63 350,580 ; C2.1 C1.1 329.69,494.68 350,515 350,580 ; v1(371.26,590.94) 360.94,590.94 350,580 ; U4.18 U4.17 U4.16 U4.15
  L1 w10: C42.2 45,515 20,540 v1(20,605) 145,605 279.37,605 J1.5 ; v1(390.94,630.32) 497.87,630.32 517.56,650 UD.E9 ; v1(540,280) 560,260 U41.5 D41.1@560,195.32 ; U4.17@746.41,330 v1(795,330) ; U2.7 770.49,714.51 745,740 745,785 755,795 790,795 789.9,795.1 U2.18 ; U2.15 884.22,789.22 890,795 890,815 910,835 C13.2 C11.2 C12.2 v1(1000,870) ; v1@965,314.79 U5.23
  L2 w10: v1(20,605) 20,875 77.87,932.87 675.33,932.87 688.21,920 855,920 ; v1(371.26,590.94) 345.94,590.94 345,590 345,610 365.31,630.32 v1(390.94,630.32) ; v1(540,280) 540,330 v1(795,330) 930,330 945,315 v1(965,315) ; v1(790,830) 790,855 855,920 ; v1(1000,870) v2(1000,920) 855,920
  L3 w10: v2(835,330) 1015,330 1055,370 1055,920 v2(1000,920)
pads on no net: J1.8 J1.9 J41. S1. U4.1 U4.10 U5.25 U5.26 U41.4 U42.4
copper on no net:
  other v4: 305,195.63 425,195.63

## Keep-outs
Keep-Out Layer:
  lines w10: -15,0 1560,0 1560,985 -15,985 -15,0

## Silkscreen, mask and mechanical layers (free items; w line width, h text height)
Mechanical 14:
  circle w2: c1174.74,752.55 r3
  lines w3: 365,420 380,420 ; 374.46,413.74 380.37,419.74 ; 374.46,425.74 380.46,419.74 ; 980,520 990,520 990,505 ; 983.74,510.54 989.74,504.63 ; 989.74,504.54 995.74,510.54 ; 1130.74,748.83 1136.74,747.26 ; 1137.74,751.98 1136.74,747.26 ; 1138.74,730.54 1144.74,724.63 ; 1144.74,779.69 1144.74,724.54 1150.74,730.54 ; 1144.74,780.54 1196.74,780.54 ; 1150.74,754.74 ccw(c1142.19,753.9) 1136.74,747.26 ; 1160.74,769.12 1159.74,774.63 ; 1163.74,775.82 1159.74,774.63 ; 1166.74,751.91 ccw(c1175.79,752.51) 1181.74,759.36 ; 1166.74,788.81 cw(c1166.17,780.27) 1159.74,774.63 ; 1179.74,754.63 1181.74,759.36 ; 1187.34,757.78 1181.74,759.36 ; 1190.74,774.63 1196.74,780.54 ; 1190.74,786.45 1196.74,780.54
  lines w5: 1017.1,527.1 1017.1,200 1345.1,200 1345.1,528 1018,528 ; 1364.08,700.52 1364.08,785.52 ; 15,80 15,270 195,270 195,80 15,80 ; 20,420 270,420 270,870 20,870 20,420 ; 210,80 520,80 520,290 210,290 210,80 ; 335,535 565,535 565,765 335,765 335,535 ; 710,670 710,830 870,830 870,670 710,670 ; 735,275 905,275 905,445 735,445 735,275 ; 855,15 1025,15 1025,150 855,150 855,15 ; 1135,835 1460,835 1460,955 1135,955 1135,835
  lines w10: 1394.08,740.52 1489.08,740.52 ; 1469.08,720.52 1479.08,720.52 1499.08,740.52 1479.08,760.52 1469.08,760.52
  text "nRF24L01" at 749.74,919.63 h30
  text "PROG" at 115,890 h30
  text "." at 720,805 h100
  text "Y" at 1199.74,774.63 h30
  text "LMB-UL" at 1229.74,764.63 h30
  text "Z" at 1209.74,749.63 h30 r180
  text "EMG-IMU" at 1229.74,734.63 h30
  text "A1" at 320,730 h10
  text "X" at 1154.74,719.63 h30 r180
  text "v011016" at 1229.74,704.63 h30
  text "J1" at 320,570 h10
  text "AFE-EMG" at 995,560 h30
  text "MCLK" at 290,410 h30
  text "CLK_AFE" at 975,410 h30 r90
  text "GND" at 20,315 h30 r90
  text "." at 885,285 h100
  text "." at 1275,260 h100
  text "IMU" at 710,250 h30
  text "ref" at 890,165 h30
  text "-" at 30,60 h30
  text "+" at 165,55 h30
  text "SWITCH" at 320,40 h30
  text "BAT" at 80,25 h30
  text "OPA" at 1075,15 h30
Mechanical 57:
  drawing of 296 lines, arcs and shapes, not listed
  text "Layer" at 32.5,2372.5 h60
  text "Name" at 442.41,2372.5 h60
  text "Material" at 1372.16,2372.5 h60
  text "Thickness" at 2231.92,2372.5 h60
  text "Constant" at 2881.76,2372.5 h60
  text "Board Layer Stack" at 3451.62,2372.5 h60
  text "1" at 32.5,2252.5 h60
  text "Top Overlay" at 442.41,2252.5 h60
  text "2" at 32.5,2132.5 h60
  text "Top Solder" at 442.41,2132.5 h60
  text "Solder Resist" at 1372.16,2132.5 h60
  text "0,40mil" at 2231.92,2132.5 h60
  text "3,5" at 2881.76,2132.5 h60
  text "3" at 32.5,2012.5 h60
  text "L1" at 442.41,2012.5 h60
  text "Copper" at 1372.16,2012.5 h60
  text "1,40mil" at 2231.92,2012.5 h60
  text "4" at 32.5,1892.5 h60
  text "Dielectric 1" at 442.41,1892.5 h60
  text "10,00mil" at 2231.92,1892.5 h60
  text "4,2" at 2881.76,1892.5 h60
  text "5" at 32.5,1772.5 h60
  text "L2" at 442.41,1772.5 h60
  text "Copper" at 1372.16,1772.5 h60
  text "1,42mil" at 2231.92,1772.5 h60
  text "6" at 32.5,1652.5 h60
  text "Dielectric 4" at 442.41,1652.5 h60
  text "5,00mil" at 2231.92,1652.5 h60
  text "4,2" at 2881.76,1652.5 h60
  text "7" at 32.5,1532.5 h60
  text "L3" at 442.41,1532.5 h60
  text "Copper" at 1372.16,1532.5 h60
  text "1,42mil" at 2231.92,1532.5 h60
  text "8" at 32.5,1412.5 h60
  text "Dielectric 5" at 442.41,1412.5 h60
  text "FR-4" at 1372.16,1412.5 h60
  text "10,00mil" at 2231.92,1412.5 h60
  text "4,2" at 2881.76,1412.5 h60
  text "9" at 32.5,1292.5 h60
  text "L4" at 442.41,1292.5 h60
  text "Copper" at 1372.16,1292.5 h60
  text "1,40mil" at 2231.92,1292.5 h60
  text "10" at 32.5,1172.5 h60
  text "Bottom Solder" at 442.41,1172.5 h60
  text "Solder Resist" at 1372.16,1172.5 h60
  text "0,40mil" at 2231.92,1172.5 h60
  text "3,5" at 2881.76,1172.5 h60
  text "11" at 32.5,1052.5 h60
  text "Bottom Overlay" at 442.41,1052.5 h60
  text "Design Comments:" at 1800,925 h60
  text "- 4-Layer HDI PCB" at 1805,790 h60
  text "- Bottom Layer Copper Thickness : 1mm*" at 1805,685 h60
  text "- Top surface finished : HASL lead free" at 1800,565 h60
  text "- Bottom surface finished : Gold plated" at 1805,440 h60
  text "mm" at -65,400 h60 r90
  text "- Vias : L1-L4, L1-L2, L2-L3" at 1810,315 h60
  text "- Solder Mask color : Green" at 1810,200 h60
  text "- Mechanical 14 is Top Overlay text" at 1815,90 h60
  text "- Quantity : 10" at 1810,-20 h60
  text "mm" at 695,-85 h60

## Dimensions
-15,0 to 1560,0 on Mechanical 16
-15,985 to -15,0 on Mechanical 16

## Text inside footprints (layer, text, board x,y; h text height)
J1: Top Overlay "9" at 160,890 h20 r90; Top Overlay "1" at 305,790 h20 r90
U4: Mechanical 16 "Z" at 829.06,365.96 h18.6 r180; Mechanical 16 "Y" at 822.28,399.46 h18.6 r180; Mechanical 16 "X" at 780.31,353.09 h18.6 r180
U5: Top Overlay "*" at 1360.1,270.26 h50 r180; Mechanical 13 "*" at 1360.1,270.26 h50 r180
U11: Top Overlay "*" at 860,135 h10
UD: Top Overlay "1" at 340,565 h10; Top Overlay "A" at 330,725 h10; Top Overlay "J" at 330,565 h10; Top Overlay "1" at 340,725 h10; Top Overlay "9" at 555,725 h10